# Allegro board smartiosap_led.brd
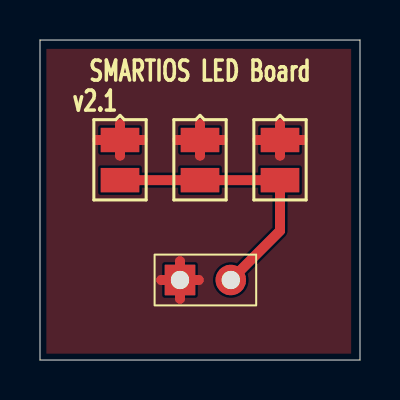
[diagram p0: board, top side]
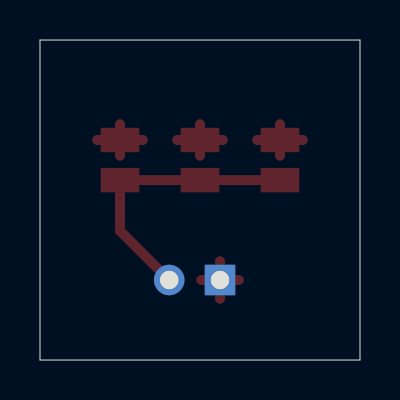
[diagram p1: board, bottom side, seen from below]

Outline 16 x 16 mm; copper layers: TOP, BOTTOM. Coordinates in mm from the lower left corner of the outline.
Outline path: 0,16 16,16 16,0 0,0 0,16

## Design rules (mm)
constraint set DEFAULT: min track width 0.127

## Placement (name value [footprint] x y rotation side)
D1  LED  [SMD0805]  4 11 270 top
D2  LED  [SMD0805]  8 11 270 top
D3  LED  [SMD0805]  12 11 270 top
J1  CON2  [JUMPER2]  7 4 0 top

## Library data of the parts
D1-D3 = LED_5
J1 = CON2: User Part Number: ***

## Footprints (pads in the part's own frame, mm; a bottom-side part is the same pattern mirrored in y, then rotated)
JUMPER2
  rect 1.524x1.524 hole 0.914: 1(0,0)
  round 1.524 hole 0.914: 2(2.54,0)
SMD0805
  rect 1.219x1.93 smd: A(2.007,0) C(0,0)

## Nets
N62875: D1.A D2.A D3.A J1.2
N62899: D1.C(CATHODE) D2.C(CATHODE) D3.C(CATHODE) J1.1

## Routing (per net, layer and track width the routed paths; a pad name or vN(x,y) marks a point on that pad's centre or on a via; arc(x,y) is an arc through that point)
N62875: length 14
  TOP w0.5: D1.A D2.A D3.A 12,6.46 J1.2
N62899: length 15.3
  TOP w0.5: J1.1 7,4.94 ; J1.1 7.94,4 ; J1.1 6.06,4 ; J1.1 7,3.06 ; D3.C 12,11.79 ; D3.C 12,10.21 ; D3.C 13.14,11 ; D3.C 10.86,11 ; D1.C 5.14,11 ; D1.C 2.86,11 ; D1.C 4,10.21 ; D1.C 4,11.79 ; D2.C 8,11.79 ; D2.C 9.14,11 ; D2.C 6.86,11 ; D2.C 8,10.21

## Copper pours and planes (outline as drawn; the poured copper is in the pictures)
N62899 on TOP: 0.32,0.32 0.32,15.56 15.56,15.56 15.56,0.32

## Text on the board
Ref Des/Silkscreen Top: v2.1 | SMARTIOS LED Board
USER_PART_NUM_TOP: FIGURE | FINISHED_SIZE | 0.9144 | DRILL CHART: TOP to BOTTOM | ALL UNITS ARE IN MILLIMETERS | PLATED | QTY | 2
